# Altium PCB Pcb - 副本-18点.PcbDoc
Units mm, origin at the board's own origin, x right, y up, seen from the top; angles counter-clockwise.
Board outline 88 x 95.2 mm, 2 copper layers (Top Layer, Bottom Layer); 65 components, 53 nets, 246 pads, 18 vias.
Unrouted connection lines stored in the file: 55.
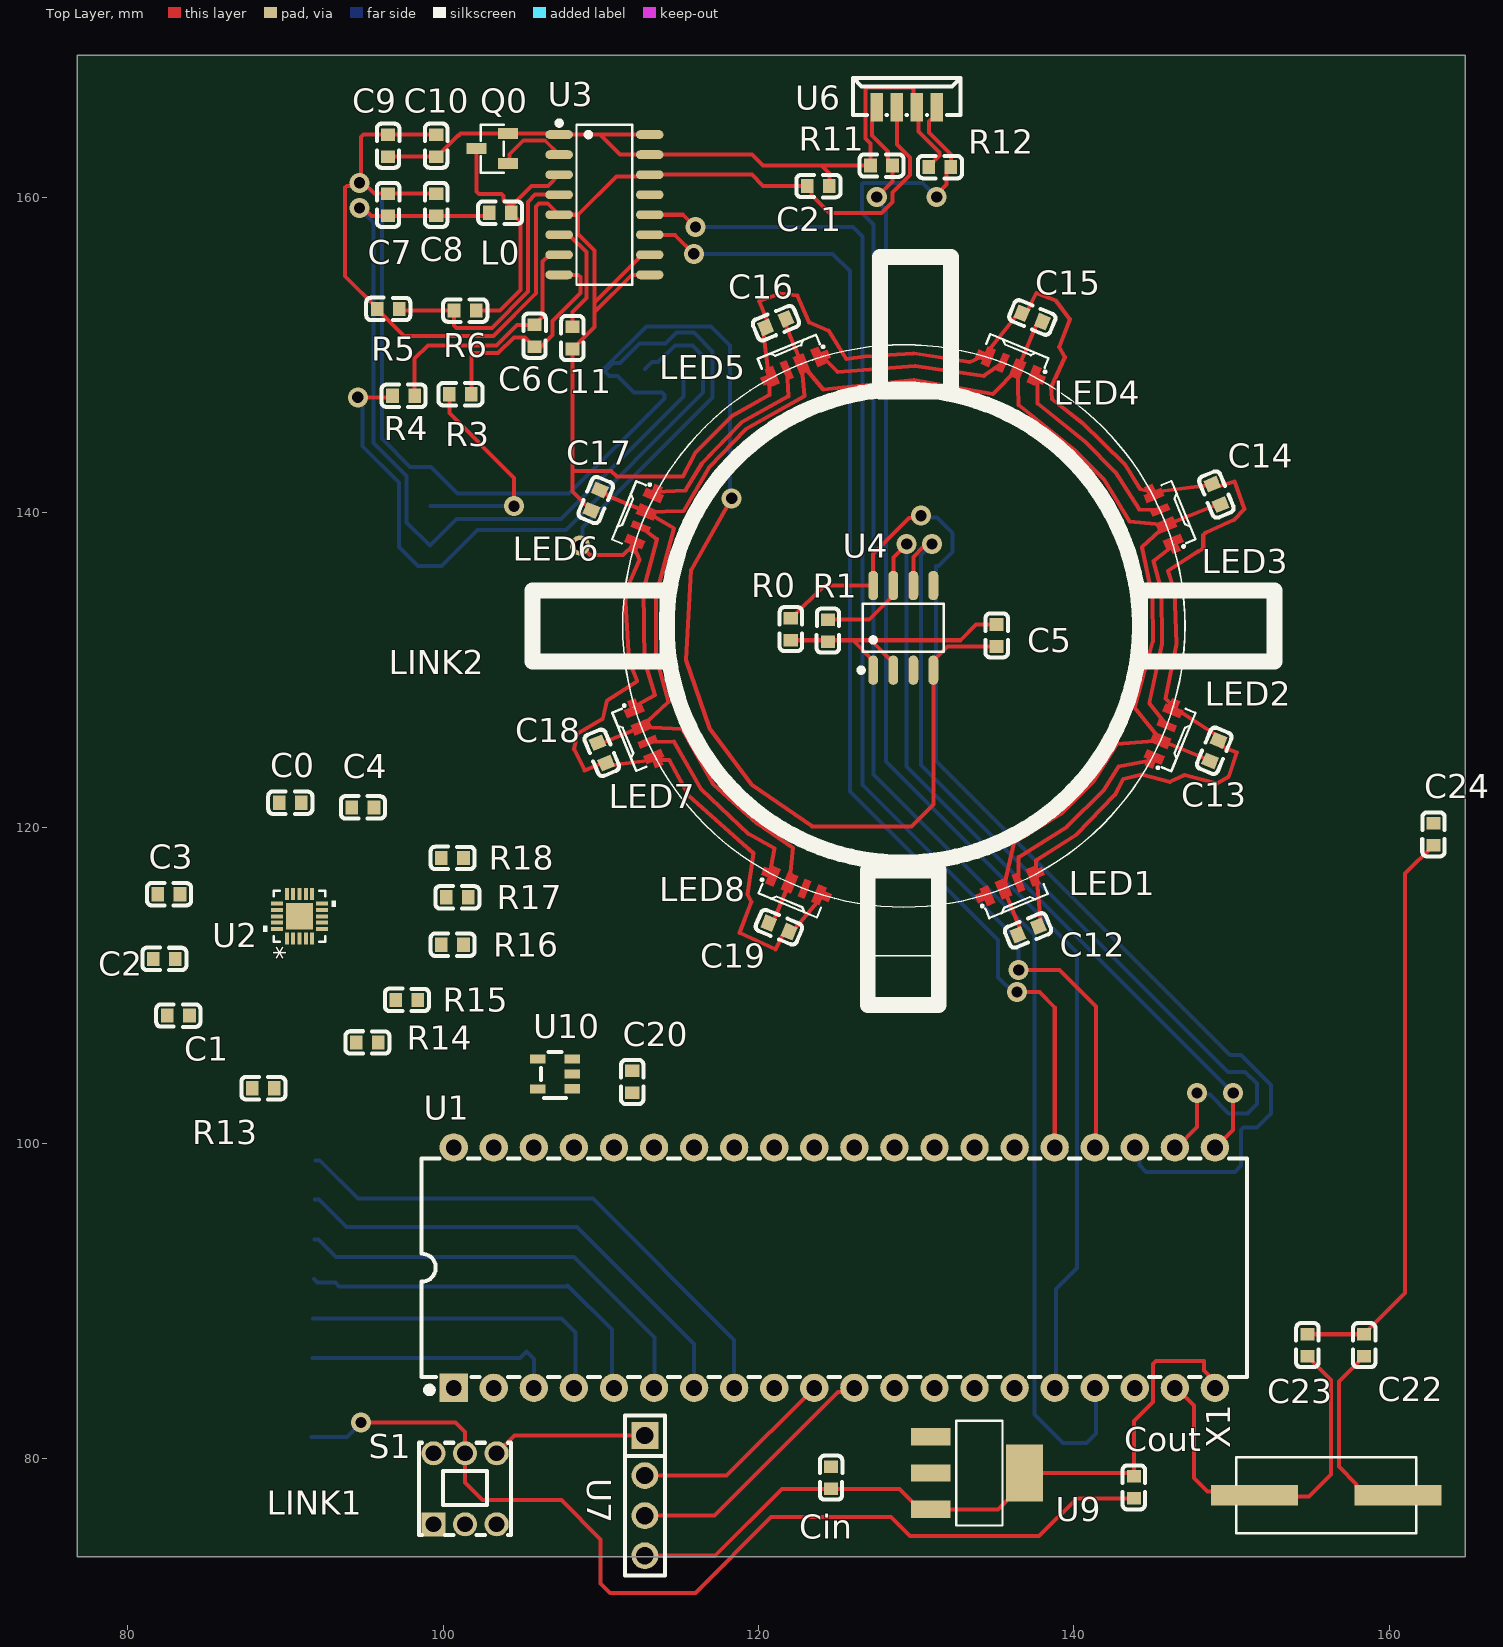
[diagram p0: Top Layer view]
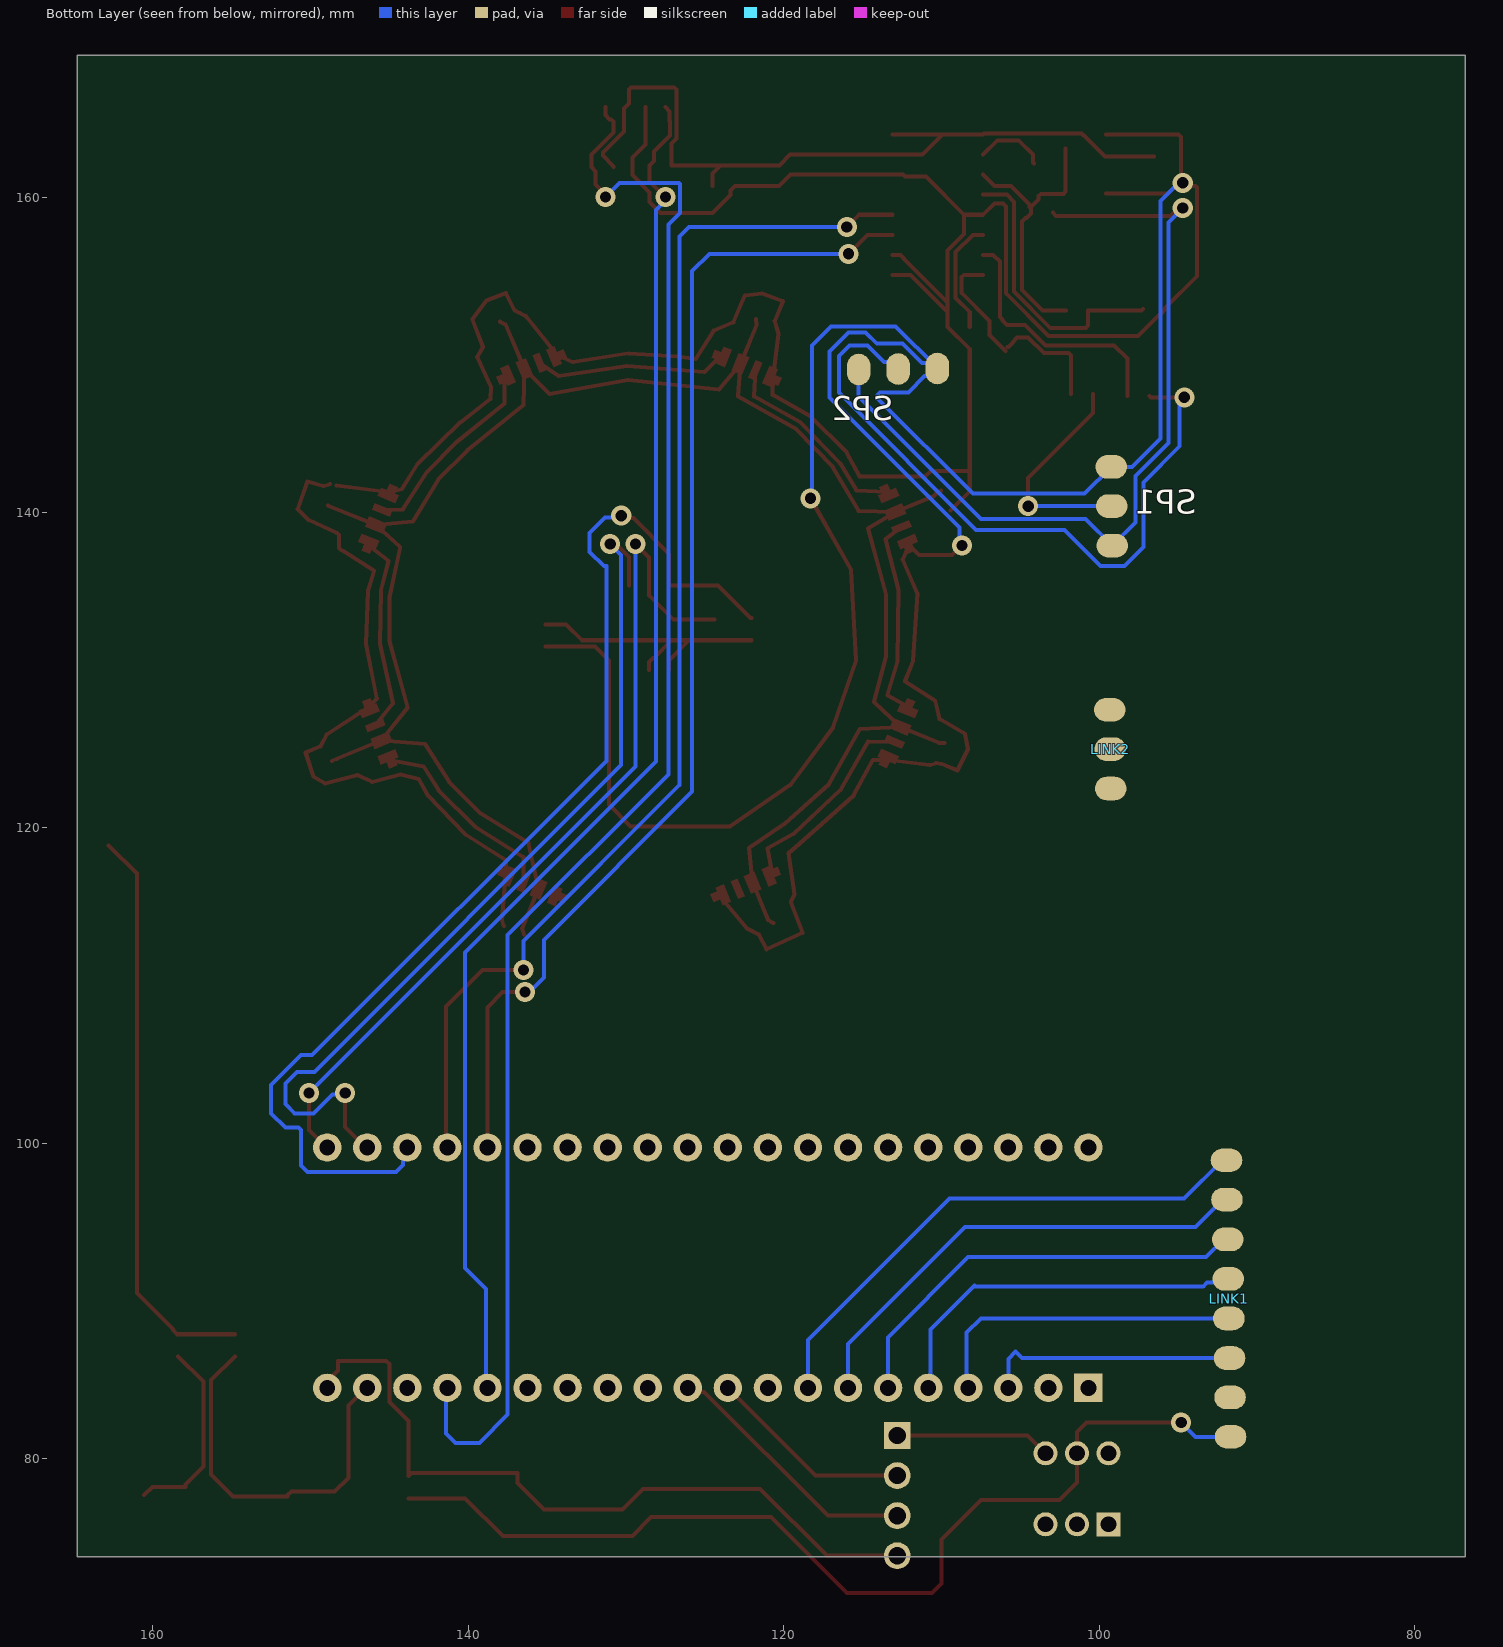
[diagram p1: Bottom Layer view, seen from below]

## Layer stack, top to bottom
Top Solder: solder mask 0.0102, Solder Resist, Dk 3.5
Top Layer: signal copper 0.0356
Dielectric 1: dielectric 0.32, FR-4, Dk 4.8
Bottom Layer: signal copper 0.0356
Bottom Solder: solder mask 0.0102, Solder Resist, Dk 3.5

## Board outline
76.8,73.8 76.8,169 164.8,169 164.8,73.8

## Design rules (kind name [scope] priority, off if disabled: settings)
Clearance [All] p1 off: gap=0.254 ignorepadtopadclearanceinfootprint=FALSE except(0: Arc-Hole Track-Hole SMDPad-Hole THPad-Hole Via-Hole Fill-Hole Poly-Hole Region-Hole Text-Hole)
PolygonConnect [All] p1: connectstyle=Relief reliefconductorwidth=0.254 reliefentries=4 polygonreliefangle="90 Angle" airgapwidth=0.254
RoutingVias [All] p1: holewidth=0.711 width=1.27 viastyle="Through Hole" minholewidth=0.711 minwidth=1.27 maxholewidth=0.711 maxwidth=1.27
SolderMaskExpansion [All] p1: expansion=0.102 istentingtop=FALSE
Width [All] p1: maxlimit=0.254 minlimit=0.254 preferedwidth=0.254
30 further rules are at their usual default settings.

## Components (designator, comment, footprint, x,y, rotation, side; value= is the part's Value field where it differs from the comment)
C0 "Capacitor 0.1 uF +/- 5% 16 V 0402" 0805贴片电容 90.324,121.6 r0 top value=100nF
C1 "Capacitor 0.1 uF +/- 5% 16 V 0402" 0805贴片电容 83.224,108.1 r0 top value=100nF
C2 "Capacitor 0.1 uF +/- 5% 16 V 0402" 0805贴片电容 82.324,111.7 r180 top value=100nF
C3 "Capacitor 0.1 uF +/- 5% 16 V 0402" 0805贴片电容 82.624,115.8 r180 top value=100nF
C4 "Capacitor 0.1 uF +/- 5% 16 V 0402" 0805贴片电容 94.924,121.3 r0 top value=100nF
C5 "Capacitor 0.1 uF +/- 5% 16 V 0402" 0805贴片电容 135.1,132.2 r270 top value=100nF
C6 "Capacitor 0.1 uF +/- 5% 16 V 0402" 0805贴片电容 105.8,151.2 r270 top value=100nF
C7 "Capacitor 0.1 uF +/- 5% 16 V 0402" 0805贴片电容 96.52,159.512 r90 top value=100nF
C8 "Capacitor 0.1 uF +/- 5% 16 V 0402" 0805贴片电容 99.568,159.512 r90 top value=100nF
C9 "Capacitor 0.1 uF +/- 5% 16 V 0402" 0805贴片电容 96.52,163.26 r90 top value=100nF
C10 "Capacitor 0.1 uF +/- 5% 16 V 0402" 0805贴片电容 99.568,163.26 r90 top value=10uF
C11 "Capacitor 0.1 uF +/- 5% 16 V 0402" 0805贴片电容 108.204,151.068 r90 top value=100nF
C12 "Capacitor 0.1 uF +/- 5% 16 V 0402" 0805贴片电容 137.1,113.5 r22.5 top value=100nF
C13 "Capacitor 0.1 uF +/- 5% 16 V 0402" 0805贴片电容 148.9,124.9 r67.5 top value=100nF
C14 "Capacitor 0.1 uF +/- 5% 16 V 0402" 0805贴片电容 149.032,141.147 r112.5 top value=100nF
C15 "Capacitor 0.1 uF +/- 5% 16 V 0402" 0805贴片电容 137.353,152.368 r157.5 top value=100nF
C16 "Capacitor 0.1 uF +/- 5% 16 V 0402" 0805贴片电容 121.1,152 r202.5 top value=100nF
C17 "Capacitor 0.1 uF +/- 5% 16 V 0402" 0805贴片电容 109.68,140.78 r247.5 top value=100nF
C18 "Capacitor 0.1 uF +/- 5% 16 V 0402" 0805贴片电容 110.068,124.753 r292.5 top value=100nF
C19 "Capacitor 0.1 uF +/- 5% 16 V 0402" 0805贴片电容 121.3,113.7 r337.5 top value=100nF
C20 "Capacitor 0.1 uF +/- 5% 16 V 0402" 0805贴片电容 112,103.9 r90 top value=100nF
C21 "Capacitor 0.1 uF +/- 5% 16 V 0402" 0805贴片电容 123.8,160.7 r180 top value=100nF
C22 "Capacitor 0.1 uF +/- 5% 16 V 0402" 0805贴片电容 158.4,87.2 r270 top value=20pF
C23 "Capacitor 0.1 uF +/- 5% 16 V 0402" 0805贴片电容 154.8,87.2 r270 top value=20pF
C24 "Capacitor 0.1 uF +/- 5% 16 V 0402" 0805贴片电容 162.8,119.6 r90 top value=100nF
Cin "Capacitor 0.1 uF +/- 5% 16 V 0402" 0805贴片电容 124.6,78.8 r270 top value=4.7uF
Cout "Capacitor 0.1 uF +/- 5% 16 V 0402" 0805贴片电容 143.8,78.2 r90 top value=4.7uF
L0 "LQM2HPN1R0MJ0L" 0805贴片电容 103.632,159.004 r0 top value=3.3µH
LED1 "SK6812SIDE-A" FZ-SK6812SIDE-A 135.965,116.311 r22.5 top
LED2 "SK6812SIDE-A" FZ-SK6812SIDE-A 145.682,125.966 r67.5 top
LED3 "SK6812SIDE-A" FZ-SK6812SIDE-A 145.687,139.625 r112.5 top
LED4 "SK6812SIDE-A" FZ-SK6812SIDE-A 136.022,149.285 r157.5 top
LED5 "SK6812SIDE-A" FZ-SK6812SIDE-A 122.322,149.249 r202.5 top
LED6 "SK6812SIDE-A" FZ-SK6812SIDE-A 112.74,139.616 r247.5 top
LED7 "SK6812SIDE-A" FZ-SK6812SIDE-A 112.748,125.982 r292.5 top
LED8 "SK6812SIDE-A" FZ-SK6812SIDE-A 122.379,116.346 r337.5 top
LINK1 "LINK" LINK 91.669,81.4 r90 top
LINK2 "LINK2" LINK2 99.269,122.5 r90 top
Q0 "MMBT4403" FZ-MMBT4403 103.124,163.068 r0 top
R0 "4D7KR2F" 0805贴片电容 122.053,132.6 r270 top value=4.7k
R1 "4D7KR2F" 0805贴片电容 124.4,132.5 r270 top value=4.7k
R3 "4D7KR2F" 0805贴片电容 101.1,147.5 r180 top value=100
R4 "4D7KR2F" 0805贴片电容 97.5,147.4 r180 top value=100
R5 "4D7KR2F" 0805贴片电容 96.52,152.908 r180 top value=8.2k
R6 "4D7KR2F" 0805贴片电容 101.4,152.8 r180 top value=10k
R11 "4D7KR2F" 0805贴片电容 127.8,162 r180 top value=2.2k
R12 "4D7KR2F" 0805贴片电容 131.5,161.9 r180 top value=2.2k
R13 "4D7KR2F" 0805贴片电容 88.6,103.5 r180 top value=10K
R14 "4D7KR2F" 0805贴片电容 95.2,106.4 r180 top value=10K
R15 "4D7KR2F" 0805贴片电容 97.7,109.1 r180 top value=10K
R16 "4D7KR2F" 0805贴片电容 100.6,112.6 r180 top value=10K (schematic designator 16)
R17 "4D7KR2F" 0805贴片电容 100.9,115.6 r180 top value=10K
R18 "4D7KR2F" 0805贴片电容 100.6,118.1 r180 top value=10K
S1 "5.8^2-Switch" FZ-Switch 101.4,78.1 r180 top
SP1 "StrainPiece1" LINK2 99.169,137.9 r90 top
SP2 "StrainPiece2" LINK2 115.245,149.066 r180 top
U1 "STC89C51-PDIP-40" 封装.STC89C51-PDIP-40 124.81,92.12 r0 top
U2 "TMC6300-3" 封装.TMC6300 90.901,114.4 r90 top
U3 "HX711" 封装.HX711 110.236,159.512 r270 top
U4 "MT6701" 封装.MT6701 129.182,132.687 r0 top
U6 "VEML7700" 封装.VEML7700 129.405,165.7 r0 top
U7 "USB" 2.54管脚 112.8,77.67 r270 top
U9 "AP2114HA-3.3" 封装.AP2114HA-3.3TRG1 133.9,79.1 r180 top
U10 "SN74LV1T34DBV" 封装.SN74LV1T34DBVR 107.1,104.4 r0 top
X1 "9C12000002" HC-49S_L11.4-W4.8 156,77.7 r180 top value=-

## Footprints (in the part's own frame and the unit in brackets; to place one, negate y for a bottom-side part, rotate by r counter-clockwise, add the part's x,y. Pads: shape width x height; smd on the part's side, far side on the other; paste and mask are expansions set on the pad)
2.54管脚 [mm]
  rect 1.7x1.7 hole 1.1: 1(-3.81,0)
  round 1.7 hole 1.1: 2(-1.27,0) 3(1.27,0) 4(3.81,0)
  silkscreen extent -5.08,-1.27 5.08,1.27
0805贴片电容 [mm]
  rect 0.8x0.9 smd: 1(-0.7,0) 2(0.7,0)
  silkscreen extent -1.41,-0.71 1.39,0.72
FZ-MMBT4403 [mm]
  rect 1.25x0.7 smd: 1(1,0.95) 2(1,-0.95) 3(-1,0)
  silkscreen extent -0.73,-1.53 0.73,1.53
FZ-SK6812SIDE-A [mil]
  round 1 smd: 1(-70.87,-0.49) 2(-17.72,0.49) 3(22.64,0.49) 4(70.86,0.49)
  Top Layer region: -31.5,24.12 -31.5,-23.13 -3.94,-23.13 -3.94,24.12 -31.5,24.12
  Top Layer region: -51.18,23.13 -51.18,-24.11 -72.84,-24.11 -72.84,-8.36 -90.55,-8.36 -90.55,13.29 -72.84,13.29 -72.84,23.13 -51.18,23.13
  Top Layer region: 13.78,-23.13 31.49,-23.13 31.49,24.11 13.78,24.11 13.78,-23.13
  Top Layer region: 51.18,24.11 51.18,-23.13 72.83,-23.13 72.83,-7.38 90.55,-7.38 90.55,14.27 72.83,14.27 72.83,24.11 51.18,24.11
  silkscreen extent -87,-54 79,-16
FZ-Switch [mil]
  rect 60x60 hole 39.37: 1(78.74,88.59)
  round 60 hole 39.37: 2(0,88.59) 3(-78.74,88.59) 4(-78.74,-88.59) 5(0,-88.59) 6(78.74,-88.59)
  silkscreen extent -115,-115 115,115
HC-49S_L11.4-W4.8 [mm]
  rect 5.5x1.3 smd: 1(-4.553,0) 2(4.553,0)
  silkscreen extent -5.72,-2.41 5.71,2.41
LINK [mm]
  oval 1.5x2 smd far side: 1(0,0) 2(2.5,-0.031) 3(4.991,-0.063) 4(7.501,-0.104) 5(10.008,-0.145) 6(12.516,-0.181) 7(15.034,-0.228) 8(17.531,-0.256)
LINK2 [mm]
  oval 1.5x2 smd far side: 1(0,0) 2(2.5,-0.031) 3(4.991,-0.063)
封装.AP2114HA-3.3TRG1 [mm]
  rect 2.5x1.1 smd: 1(2.97,-2.3) 2(2.97,0) 3(2.97,2.3)
  rect 2.34x3.6 smd: 4(-2.97,0)
  silkscreen extent -1.57,-3.33 1.37,3.33
封装.HX711 [mm]
  oval 0.56x1.745 smd: 1(-4.445,-2.872) 2(-3.175,-2.872) 3(-1.905,-2.872) 4(-0.635,-2.872) 5(0.635,-2.872) 6(1.905,-2.872) 7(3.175,-2.872) 8(4.445,-2.872) 9(4.445,2.872) 10(3.175,2.872) 11(1.905,2.872) 12(0.635,2.872) 13(-0.635,2.872) 14(-1.905,2.872) 15(-3.175,2.872) 16(-4.445,2.872)
  silkscreen extent -5.33,-3.02 5.08,1.77
封装.MT6701 [mm]
  oval 0.63x1.865 smd: 1(-1.905,-2.682) 2(-0.635,-2.682) 3(0.635,-2.682) 4(1.905,-2.682) 5(1.905,2.683) 6(0.635,2.683) 7(-0.635,2.683) 8(-1.905,2.683)
  silkscreen extent -2.82,-2.83 2.58,1.52
封装.SN74LV1T34DBVR [mm]
  rect 1x0.6 smd paste+0 mask+0.05: 1(1.1,-0.95) 2(1.1,0) 3(1.1,0.95) 4(-1.1,0.95) 5(-1.1,-0.95)
  silkscreen extent -0.89,-1.52 0.7,1.4
封装.STC89C51-PDIP-40 [mm]
  rect 1.8x1.8 hole 1: 1(-24.13,-7.62)
  round 1.8 hole 1: 2(-21.59,-7.62) 3(-19.05,-7.62) 4(-16.51,-7.62) 5(-13.97,-7.62) 6(-11.43,-7.62) 7(-8.89,-7.62) 8(-6.35,-7.62) 9(-3.81,-7.62) 10(-1.27,-7.62) 11(1.27,-7.62) 12(3.81,-7.62) 13(6.35,-7.62) 14(8.89,-7.62) 15(11.43,-7.62) 16(13.97,-7.62) 17(16.51,-7.62) 18(19.05,-7.62) 19(21.59,-7.62) 20(24.13,-7.62) 21(24.13,7.62) 22(21.59,7.62) 23(19.05,7.62) 24(16.51,7.62) 25(13.97,7.62) 26(11.43,7.62) 27(8.89,7.62) 28(6.35,7.62) 29(3.81,7.62) 30(1.27,7.62) 31(-1.27,7.62) 32(-3.81,7.62) 33(-6.35,7.62) 34(-8.89,7.62) 35(-11.43,7.62) 36(-13.97,7.62) 37(-16.51,7.62) 38(-19.05,7.62) 39(-21.59,7.62) 40(-24.13,7.62)
  silkscreen extent -26.16,-7.95 26.16,6.93
封装.TMC6300 [mil]
  rect 30x10 smd paste+0 mask+0: 1(-56,31.5) 2(-56,15.75) 3(-56,0) 4(-56,-15.75) 5(-56,-31.5) 11(56,-31.5) 12(56,-15.75) 13(56,0) 14(56,15.75) 15(56,31.5)
  rect 10x30 smd paste+0 mask+0: 6(-31.5,-56) 7(-15.75,-56) 8(0,-56) 9(15.75,-56) 10(31.5,-56) 16(31.5,56) 17(15.75,56) 18(0,56) 19(-15.75,56) 20(-31.5,56)
  rect 67x67 smd paste+0 mask+0: 21(0,0)
  silkscreen extent -64,-91 64,91
封装.VEML7700 [mm]
  rect 0.8x1.8 smd paste+0 mask+0.05: 1(1.905,0) 2(0.635,0) 3(-0.635,0) 4(-1.905,0)
  silkscreen extent -3.4,-0.5 3.4,1.85

## Part data
C0 C1 C2 C3 C4 C5 C6 C7 C8 C9 C10 C11 C12 C13 C14 C15 C16 C17 C18 C19 C20 C21 C22 C23 C24 Cin Cout: library part CAP-NP-2, "Chip Capacitor, 0.1 uF, +/- 5%, 16 V, 0402 (1005 Metric)", Capacitor Type=Ceramic, Case/Package=0402, Max Operating Temperature=125°C, Min Operating Temperature=-55°C, Tolerance=5%, Voltage Rating=16V, Mounting Technology=SM, Pins=2, RoHS Compliant=True
L0: library part CMP-006-00008-6, "Chip Inductor, 1 uH, +/- 20%, 1 MHz, -55 to 125 degC, 1008 (2520 Metric), RoHS, Tape and Reel", Case/Package=1008, Current Rating=1.5A, Manufacturer=Murata, Max Operating Temperature=85°C, Min Operating Temperature=-40°C, Package Description="2-Pin Surface Mount Device, Body 2.5 x 2 mm", Package Quantity=3000, Resistance=0.09Ohm, Self Resonant Frequency=70MHz, Tolerance=20%, Core Material=Ferrite, Datasheet URL=http://psearch.en.murata.com/inductor/product/LQM2HPN1R0MJ0%23.pdf, Datasheet Version=Aug-16, Mounting Technology=SM, Package Reference=1008, Packaging=TapeandReel, RoHS Compliant=True, Shielding=Shielded
LED1 LED2 LED3 LED4 LED5 LED6 LED7 LED8: library part CMP-007-000137-1, Design Item ID=SK6812SIDE-A, Source=IC.SchLib
LINK1: library part CMP-014-000001-1, Design Item ID=LINK, Source=Board.SchLib
LINK2: library part CMP-014-000018-1, Design Item ID=LINK2, Source=Board.SchLib
Q0: library part CMP-013-00004-3, Case/Package=TO-92-3, Manufacturer=Unisonic, Package Description="3-Pin Through Hole Device, Dia 4.58 mm, Pitch 1.27 mm", Datasheet URL=http://media.nkcelectronics.com/datasheet/s8550.pdf, Datasheet Version="Rev. E, 06/2014", Mounting Technology=TH, Package Reference=TO-92-3, RoHS Compliant=Unknown
R0 R1 R3 R4 R5 R6 R12 R13 R14 R15 R16 R17 R18: library part CMP-009-00105-2, "4K7 0.063W 1% 0402 (1005 Metric)  SMD", Case/Package=0402, Power=63mW, Tolerance=1%, Mounting Technology=SMT, Pins=2
R11: library part CMP-009-00105-2, Case/Package=0402, Power=63mW, Tolerance=1%, Mounting Technology=SMT, Pins=2
S1: library part CMP-011-00013-1, Design Item ID=5.8^2-Switch, Designer=U?, Device="5.8 ZSPT", Source=IC.SchLib, Symbol="5.8 ZSPT"
SP1: library part CMP-014-000027-1, Design Item ID=StrainPiece1, Source=Board.SchLib
SP2: library part CMP-014-000028-1, Design Item ID=StrainPiece2, Source=Board.SchLib
U1: library part CMP-007-000098-1, "主控MCU", Design Item ID=STC89C51-PDIP-40, Source=IC.SchLib
U2: library part CMP-007-000236-1, Design Item ID=TMC6300-3, Source=IC.SchLib
U3: library part CMP-007-000093-1, "压力模数转换器", Design Item ID=HX711, Source=IC.SchLib
U4: library part CMP-007-000116-1, "霍尔传感器", Design Item ID=MT6701, Source=IC.SchLib
U6: library part CMP-007-000095-1, "感光想读传感器", Design Item ID=VEML7700, Source=IC.SchLib
U7: library part CMP-007-000053-1, Design Item ID=USB, Source=IC.SchLib
U9: library part CMP-007-000082-1, "电压控制器", Design Item ID=AP2114HA-3.3, Source=IC.SchLib
U10: library part CMP-007-000097-1, "电流放大器", Design Item ID=SN74LV1T34DBV, Source=IC.SchLib
X1: library part CMP-007-000156-1, JLCPCB Part Class="Extended Part", LCSC Part Name="SMD HC-49S 12M 49SMD 20pF 20ppm 30R 0~70℃", Load Capacitance=-, Manufacturer=TXC(晶技), Add into BOM=yes, Convert to PCB=yes, Crystal Type=-, Datasheet=https://atta.szlcsc.com/upload/public/pdf/source/20161217/1481939208787.pdf, Design Item ID=9C12000002, Device=9C12000002, Manufacturer Part=9C12000002, Operating Temperature=-, Source=IC.SchLib, Supplier Footprint=HC-49S-SMD, Supplier Part=C90939, Symbol=9C1202LCSC-DDK2S

## Via types
v1: diameter 1.27, hole 0.711, Top Layer to Bottom Layer, 18 vias

## Nets (pads, with @x,y where several pads share a name; then routed paths per layer and width w, separated by ;. In a path a pad name is that pad's centre, name@x,y a point inside that pad or via, vN(x,y) a via of type N, cw(c..) or ccw(c..) an arc to the next point about the centre after c; other vN are vias at no path point)
+3.3V: C1.1 C2.1 C3.1 C5.1 C9.1 C10.1 C21.1 C24.2 Cout.1 LINK1.1 Q0.1 R0.2 R1.2 R11.2 R12.2 S1.5 U2.18 U3.1 U3.15 U3.16 U4.1 U4.2 U6.2 | length 133
  Top Layer w0.254: v1(94.8,82.3) 100.8,82.3 101.4,81.7 S1.5 101.4,78.5 102.5,77.4 107.5,77.4 110,74.9 110,72.1 110.6,71.5 116,71.5 120.8,76.3 128.4,76.3 129.6,75.1 137.8,75.1 140.2,77.5 Cout.1 ; C9.1 C10.1 99.618,162.56 100.958,163.9 101,163.9 101.118,164.018 Q0.1 106.494,164.018 106.496,164.016 107.305,164.016 U3.1 109.943,163.957 ; U3.16 109.943,163.957 ; R0.2 125.999,131.9 ; C21.1 124.5,161.5 124,162 ; U4.1 127.277,130.622 125.999,131.9 ; U4.2 128.547,130.521 128.281,130.786 128.234,130.786 127.121,131.9 ; R12.2 130.8,161.95 131.47,162.62 131.47,162.83 130.132,164.168 130.132,165.608 129.82,165.92 129.82,166.811 129.672,166.96 126.949,166.96 126.8,166.811 126.8,163.7 127.1,163.4 R11.2 124,162 ; C5.1 133.8,132.9 132.8,131.9 127.121,131.9 ; 109.943,163.957 111.213,162.687 U3.15 119.587,162.687 120.274,162 124,162 ; 125.999,131.9 127.121,131.9
  Bottom Layer w0.254: LINK1.1 93.9,81.4 v1(94.8,82.3)
+5: C4.1 C12.1 C13.1 C14.1 C15.1 C16.1 C17.1 C18.1 C19.1 LED1.2 LED2.2 LED3.2 LED4.2 LED5.2 LED6.2 LED7.2 LED8.2 U2.11 | length 131.6
  Top Layer w0.254: C18.1 110.152,125.393 LED7.2 ; C17.1@110.03,141.374 C17.1@110.03,141.386 ; C17.1@110.228,141.328 110.462,141.047 LED6.2 ; C19.1 120.993,114.177 LED8.2 122.184,118.741 119.914,120.291 117.132,122.771 115.173,126.27 LED7.2 ; C16.1 121.71,151.903 LED5.2 ; C12.1 136.582,113.635 LED1.2 136.195,119.058 139.221,120.921 141.215,122.924 142.731,125.312 LED2.2 ; C15.1 137.624,151.906 LED4.2 ; C13.1 148.335,124.38 LED2.2 ; C14.1@148.897,140.429 LED3.2 ; LED7.2 114.283,127.99 113.509,130.868 113.5,134.766 114.644,138.994 LED6.2 ; LED6.2 115.253,140.096 116.885,142.874 119.174,145.272 122.906,147.378 LED5.2 ; LED5.2 124.111,147.804 129.865,148.396 134.861,147.524 LED4.2 ; LED4.2 136.497,146.82 140.09,143.908 141.878,142.122 143.529,139.416 LED3.2 ; LED2.2 143.836,127.632 145,131.835 144.994,134.626 144.313,137.803 LED3.2
+5V: C20.1 Cin.1 U1.40 U10.5
LCD_BACKLIGHT: LINK1.6 U1.6 | length 27.3
  Bottom Layer w0.254: LINK1.6 92.101,93.916 93.216,92.8 108.3,92.8 113.4,87.7 113.4,84.52 U1.6
LCD_CMD: LINK1.8 U1.8 | length 34.3
  Bottom Layer w0.254: LINK1.8 92.175,98.931 94.606,96.5 109.5,96.5 118.46,87.54 U1.8
LCD_CS: LINK1.7 U1.7 | length 30.6
  Bottom Layer w0.254: LINK1.7 92.147,96.434 93.88,94.7 108.5,94.7 115.92,87.28 U1.7
LCD_DATA: LINK1.5 U1.5 | length 24
  Bottom Layer w0.254: LINK1.5 92.053,91.17 93.171,91.17 93.4,90.941 107.841,90.941 107.895,90.995 110.7,88.19 110.7,84.64 U1.5
LCD_RST: LINK1.3 U1.3 | length 16.2
  Bottom Layer w0.254: LINK1.3 104.891,86.391 105.295,86.795 105.76,86.33 U1.3
LCD_SCK: LINK1.4 U1.4 | length 20.5
  Bottom Layer w0.254: LINK1.4 107.499,88.901 108.4,88 108.4,84.6 U1.4
LED_DATA_3V3: U1.26 U10.2
LED_DATA_5V: LED1.1 U10.4
MAG_CLK: R1.1 U1.21 U4.7 | length 55.7
  Top Layer w0.254: R1.1 126.994,133.2 128.547,134.752 U4.7 128.547,137.147 v1(129.4,138) ; U1.21@149.03,99.72 149.03,99.78 150.1,100.85 v1(150.1,103.2)
  Bottom Layer w0.254: v1(129.4,138) 129.4,123.9 v1(150.1,103.2)
MAG_CSN: U1.22 U4.6 | length 57.2
  Top Layer w0.254: U4.6 129.817,137.183 130.439,137.806 130.806,137.806 v1(131,138) ; U1.22@146.49,99.72 147.8,101.03 v1(147.8,103.2)
  Bottom Layer w0.254: v1(131,138) 130.3,137.3 130.3,124 149.759,104.541 150.859,104.541 151.6,103.8 151.6,102.5 151,101.9 149.8,101.9 148.614,103.086 147.914,103.086 v1(147.8,103.2)
MAG_DO: R0.1 U1.23 U4.8 | length 73.7
  Top Layer w0.254: R0.1 122.103,133.3 124.173,135.37 U4.8 127.277,137.377 129.536,139.636 130.136,139.636 v1(130.3,139.8)
  Bottom Layer w0.254: v1(130.3,139.8) 130.416,139.684 131.316,139.684 132.3,138.7 132.3,137.5 131.4,136.6 131.249,136.6 131.249,124.251 149.9,105.6 150.6,105.6 152.5,103.7 152.5,101.9 151.6,101 150.749,101 150.6,100.851 150.6,98.6 150.2,98.2 144.568,98.2 144.151,98.617 144.151,99.519 U1.23@143.95,99.72
NetC0_2: C0.2 U2.13
NetC1_2: C1.2 U2.2
NetC6_1: C6.1 R4.1 U3.7 | length 16.3
  Top Layer w0.254: R4.1 98.2,149.751 99.049,150.6 103.4,150.6 104.7,151.9 C6.1 105.85,151.9 106.123,152.173 106.123,152.223 106.3,152.4 106.3,155.9 106.737,156.337 U3.7
NetC6_2: C6.2 R3.1 U3.8 | length 14.4
  Top Layer w0.254: R3.1 101.8,149.951 101.949,150.1 103.5,150.1 104.5,151.1 105.2,151.1 105.477,150.823 105.477,150.773 105.75,150.5 C6.2 ; C6.2@105.951,150.249 106.948,151.245 106.948,152.148 108.712,153.912 108.712,154.918 108.563,155.067 U3.8
NetC11_2: C11.2 U3.6 | length 7.3
  Top Layer w0.254: U3.6 107.993,157.607 109.1,156.5 109.1,153.604 108.204,152.708 C11.2
NetC22_2: C22.2 C23.2 U1.18 U1.19 X1.1 X1.2 | length 36.2
  Top Layer w0.254: U1.19@146.49,84.48 147.6,83.37 147.6,78.8 148.465,77.935 151.212,77.935 X1.2 ; X1.2@151.447,77.6 154.9,77.6 156.3,79 156.3,85 C23.2 ; C22.2 156.8,84.9 156.8,79.5 157.93,78.37 157.93,78.223 160.03,78.223 X1.1
NetL0_2: L0.2 Q0.3 R6.1 U3.3 | length 18.3
  Top Layer w0.254: R6.1 103.6,152.8 104.9,154.1 104.9,158.436 104.655,158.681 104.605,158.681 L0.2@104.332,158.954 ; Q0.3 102.124,160.349 102.273,160.2 103.701,160.2 103.85,160.051 103.85,159.85 104.332,159.368 L0.2@104.408,159.368 ; L0.2 104.332,159.432 105.6,160.7 106.647,160.7 U3.3
NetLED1_3: LED1.3 LED2.1 | length 12.5
  Top Layer w0.254: LED1.3 136.499,118.155 139.576,120.085 141.879,122.379 142.837,123.9 LED2.1
NetLED2_3: LED2.3 LED3.1 | length 12.7
  Top Layer w0.254: LED2.3 144.777,127.903 145.594,131.671 145.546,135.029 145.048,136.919 LED3.1
NetLED3_3: LED3.3 LED4.1 | length 12.4
  Top Layer w0.254: LED4.1 137.701,146.918 140.71,144.49 142.615,142.577 144.14,140.195 LED3.3
NetLED4_3: LED4.3 LED5.1 | length 12.3
  Top Layer w0.254: LED5.1 125.027,148.91 129.928,149.296 134.284,148.659 LED4.3
NetLED5_3: LED5.3 LED6.1 | length 12.6
  Top Layer w0.254: LED6.1 115.388,141.409 115.404,141.436 116.42,143.121 118.933,145.718 121.89,147.367 LED5.3
NetLED6_3: LED6.3 LED7.1 | length 13
  Top Layer w0.254: LED7.1 113.431,128.426 112.771,130.596 112.717,135.094 113.557,138.308 LED6.3
NetLED7_3: LED7.3 LED8.1 | length 12.9
  Top Layer w0.254: LED7.3 114.641,125.496 116.381,122.434 119.377,119.622 121.021,118.701 LED8.1
NetQ0_2: Q0.2 U3.2 | length 4.5
  Top Layer w0.254: Q0.2 104.2,162.194 104.2,162.7 105.1,163.6 106.451,163.6 U3.2
NetR5_1: R5.1 R6.2 U3.4 | length 18
  Top Layer w0.254: R5.1 97.328,152.8 R6.2 100.7,151.849 100.849,151.7 103.1,151.7 105.4,154 105.4,159.7 105.847,160.147 U3.4
NetS1_4: S1.4 U7.1 | length 9.9
  Top Layer w0.254: S1.4 104.53,81.48 U7.1
NetU9_1: U9.1
NetU9_2: U9.2
SCL: R12.1 U1.17 U6.1 | length 102.8
  Top Layer w0.254: v1(131.3,160) 131.3,160.183 131.927,160.81 131.927,161.627 R12.1 132.2,162.7 130.8,164.1 130.8,164.778 130.949,164.927 131.037,164.927 131.31,165.2 U6.1 ; U1.17@141.4,84.072 U1.17@141.4,84.47
  Bottom Layer w0.254: v1(131.3,160) 130.4,160.9 126.649,160.9 126.565,160.816 126.565,159 127.3,158.265 127.3,123.4 137.5,113.2 137.5,82.8 139.3,81 140.8,81 141.41,81.61 U1.17@141.41,84.48
SDA: R11.1 U1.16 U6.4 | length 88.1
  Top Layer w0.254: v1(127.5,160) 128.5,161 R11.1 128.227,162.273 128.227,162.873 127.2,163.9 127.2,164.778 127.227,164.805 127.227,165.427 U6.4 ; U1.16@138.87,84.48 U1.16@138.876,84.474
  Bottom Layer w0.254: v1(127.5,160) 127.5,159.763 128.1,159.163 128.1,124.2 140.2,112.1 140.2,92.1 138.87,90.77 U1.16@138.87,84.48
STRAIN_DO: U1.24 U3.12 | length 79.5
  Top Layer w0.254: U3.12 115.223,158.877 v1(116,158.1) ; v1(136.5,111) 139.09,111 141.41,108.68 U1.24@141.41,99.72
  Bottom Layer w0.254: v1(116,158.1) 126,158.1 126.6,157.5 126.6,122.738 136.5,112.838 v1(136.5,111)
STRAIN_E+: C7.1 C8.1 L0.1 SP1.1 SP2.1 | length 53.6
  Top Layer w0.254: v1(94.7,159.3) 94.975,159.3 95.463,158.812 C7.1 C8.1 102.74,158.812 L0.1
  Bottom Layer w0.254: v1@94.7,159.2 v1(94.7,159.3) 95.6,158.4 95.6,144.4 97.7,142.3 97.7,139.369 SP1.1 100.852,139.582 107.482,139.582 115.245,147.345 SP2.1
STRAIN_E-: C0.1 C2.2 C3.2 C4.2 C5.2 C7.2 C8.2 C9.2 C10.2 C11.1 C12.2 C13.2 C14.2 C15.2 C16.2 C17.2 C18.2 C19.2 C20.2 C21.2 C22.1 C23.1 C24.1 Cin.2 Cout.2 LED1.4 LED2.4 LED3.4 LED4.4 LED5.4 LED6.4 LED7.4 LED8.4 LINK1.2 R5.2 R13.1 R14.1 R15.1 R16.1 R17.1 R18.1 SP1.3 SP2.3 U1.20 U2.8 U2.9 U2.14 U2.16 U2.20 U2.21 U3.5 U3.9 U3.10 U3.14 U4.4 U6.3 U7.4 U9.3 U9.4 U10.3 | length 473.4
  Top Layer w0.254: C8.2 C7.2 95.649,160.212 94.961,160.9 v1(94.7,160.9) ; C10.2 C9.2 94.957,163.96 94.808,163.811 94.808,161.008 v1(94.7,160.9) ; v1(108.7,137.9) 108.737,137.9 109.332,137.305 111.419,137.305 LED6.4 112.456,137.005 111.527,134.871 111.788,130.602 112.313,129.314 110.393,128.061 110.126,126.913 108.511,125.965 108.318,124.989 108.981,123.642 110.003,124.066 C18.2 110.739,123.978 LED7.4 114.344,124.303 115.579,122.039 118.999,119.001 119.69,118.396 119.313,115.79 119.549,115.304 118.794,113.345 121.081,112.3 121.571,113.238 C19.2 122.323,113.626 LED8.4 ; C17.2 108.204,141.341 108.204,142.64 ; U7.4 117.26,73.86 121.5,78.1 Cin.2 128.93,78.1 130.23,76.8 U9.3 135.2,76.8 136.87,78.47 U9.4 143.6,79.1 Cout.2 143.8,82.4 145,83.6 145,86 145.2,86.2 148.251,86.2 148.251,85.607 148.94,84.918 U1.20 ; U3.9 111.967,155.067 109.6,152.7 ; U3.10 112.599,156.337 112.363,156.101 112.363,156.063 109.6,153.3 ; v1(118.3,140.9) 115.729,136.352 115.403,130.65 116.887,126.338 119.575,122.734 123.4,120.1 129.7,120.1 131.087,121.487 U4.4 131.087,130.609 131.978,131.5 133.7,131.5 C5.2 ; U6.3 128.77,163.33 129.6,162.5 129.6,161.4 128.5,160.3 128.5,159.7 127.8,159 124.5,159 123.373,160.127 123.373,160.427 C21.2 120.3,160.7 119.583,161.417 U3.14 112.433,161.417 112.306,161.289 110.984,161.289 108.572,158.877 ; C12.2 137.875,114.171 LED1.4 137.603,117.95 140.174,119.584 142.576,122.075 143.141,123.094 144.292,123.386 146.102,122.925 147.013,123.359 149.086,122.829 149.812,123.249 150.326,124.781 149.365,125.179 C13.2 148.974,125.923 LED2.4 145.799,128.2 146.494,131.67 146.362,135.026 145.962,136.303 147.885,137.54 147.9,137.55 148.093,137.638 148.2,137.745 148.2,138.588 148.307,138.695 148.348,138.714 150.135,139.535 150.814,140.214 150.182,141.973 149.167,141.665 C14.2 ; C14.2@148.361,141.722 LED3.4 144.207,141.474 143.217,143.073 140.509,145.691 138.6,147.2 138.546,147.935 139.433,149.854 139.065,150.488 139.744,152.254 138.846,153.44 137.614,153.917 137.082,152.83 C15.2 136.331,152.442 LED4.4 133.37,149.531 129.828,150.096 126.711,149.901 125.579,149.727 124.445,151.529 123.199,152.058 122.466,153.747 121.366,153.891 120.046,153.393 120.569,152.13 C16.2 120.325,151.329 LED5.4 120.695,147.462 118.33,146.117 116.027,143.827 115.191,142.27 111.03,142.27 110.66,142.64 108.204,142.64 ; C23.1 C22.1 158.45,87.9 158.723,88.173 158.723,88.223 161,90.5 161,117.1 C24.1 ; v1(94.7,160.9) 94.506,160.706 93.906,160.706 93.8,160.6 93.8,154.978 95.82,152.958 R5.2 95.82,152.858 96.093,152.585 96.143,152.585 97.528,151.2 103.2,151.2 105.9,153.9 105.9,159.4 106.1,159.6 106.641,159.6 U3.5 108.572,158.877 ; 108.204,142.64 C11.1 109.6,151.764 109.6,152.7 ; 108.572,158.877 108.572,157.645 109.6,156.617 109.6,153.3 ; 109.6,152.7 109.6,153.3
  Bottom Layer w0.254: v1(94.7,160.9) 94.961,160.9 96.12,159.741 96.12,144.68 97.909,142.891 SP1.3 100.923,141.2 108,141.2 114.041,147.241 114.041,147.451 113.892,147.6 112.1,147.6 111.06,148.64 110.56,148.64 SP2.3@110.254,148.946 ; v1(108.7,137.9) 108.843,138.043 108.843,139.043 117.1,147.3 117.1,150.2 115.9,151.4 114.8,151.4 114.1,150.7 112.454,150.7 111.236,149.482 110.79,149.482 SP2.3@110.345,149.037 ; SP2.3 110.254,149.154 112.9,151.8 117,151.8 118.2,150.6 v1@118.2,141.2
STRAIN_S+: R3.2 SP1.2 | length 14.1
  Top Layer w0.254: R3.2 100.4,146.3 104.5,142.2 v1(104.5,140.4)
  Bottom Layer w0.254: SP1.2 v1(104.5,140.4)
STRAIN_S-: R4.2 SP2.2 | length 44.1
  Top Layer w0.254: v1(94.6,147.3) 96.7,147.3 R4.2
  Bottom Layer w0.254: v1(94.6,147.3) 94.6,147.025 94.9,146.725 94.9,144.2 97.2,141.9 97.2,137.8 98.4,136.6 99.9,136.6 102.2,138.9 107.8,138.9 116.495,147.595 116.495,149.935 115.83,150.6 114.7,150.6 113.641,149.541 113.241,149.541 SP2.2@112.8,149.1
STRAIN_SCK: U1.25 U3.11 | length 75.6
  Top Layer w0.254: U3.11 114.693,157.607 v1(115.9,156.4) ; v1(136.4,109.6) 136.416,109.584 137.816,109.584 138.785,108.615 138.785,99.805 U1.25@138.87,99.72
  Bottom Layer w0.254: v1(115.9,156.4) 124.7,156.4 125.8,155.3 125.8,122.3 135.2,112.9 135.2,110.525 136.125,109.6 v1(136.4,109.6)
TMC_DIAG: U1.33 U2.12
TMC_UH: R13.2 U1.39 U2.3
TMC_UL: R16.2 U1.36 U2.6
TMC_VH: R14.2 U1.38 U2.4
TMC_VL: R18.2 U1.34 U2.10
TMC_WH: R15.2 U1.37 U2.5
TMC_WL: R17.2 U1.35 U2.7
U: LINK2.1 U2.15
USB-RX: U1.11 U7.3 | length 16.6
  Top Layer w0.254: U7.3 117.2,76.4 125.038,84.238 125.818,84.238 U1.11
USB-TX: U1.10 U7.2 | length 13
  Top Layer w0.254: U7.2 117.98,78.94 U1.10
V: LINK2.2 U2.17
W: LINK2.3 U2.1
pads on no net: LED8.3 S1.1 S1.2 S1.3 S1.6 U1.1 U1.2 U1.9 U1.12 U1.13 U1.14 U1.15 U1.27 U1.28 U1.29 U1.30 U1.31 U1.32 U2.19 U3.13 U4.3 U4.5 U10.1

## Silkscreen, mask and mechanical layers (free items; w line width, h text height)
Top Overlay:
  circle w0.1: c129.215,132.81 r17.826
  circle w1: c129.182,132.81 r15
  lines w0.1: 126.932,111.908 129.182,111.908 131.432,111.908 ; 131.432,108.768 129.182,108.768 126.932,108.768 126.932,117.306 129.182,117.306 131.432,117.306
  lines w1: 105.674,130.56 105.674,135.061 114.213,135.061 114.213,130.56 105.674,130.56 ; 126.932,108.768 131.433,108.768 131.433,117.307 126.932,117.307 126.932,108.768 ; 127.7,147.662 132.201,147.662 132.201,156.201 127.7,156.201 127.7,147.662 ; 144.182,130.56 144.182,135.061 152.721,135.061 152.721,130.56 144.182,130.56
Mechanical 6:
  the board outline again, w0.254
Mechanical 13:
  lines w0.254: 93.4,73.8 164.8,73.8 164.8,168.6 93.4,168.6 93.4,73.8

## Text inside footprints (layer, text, board x,y; h text height)
U2: Top Overlay "*" at 90.536,111.644 h1.27 r90; Mechanical 13 "*" at 90.536,113.041 h1.27 r90